# Altium PCB pcbCambiennhietdotestboard.PcbDoc
Units mm, origin at the board's own origin, x right, y up, seen from the top; angles counter-clockwise.
Board outline 68.38 x 50.51 mm, 2 copper layers (Top Layer, Bottom Layer); 51 components, 49 nets, 185 pads, 40 vias.
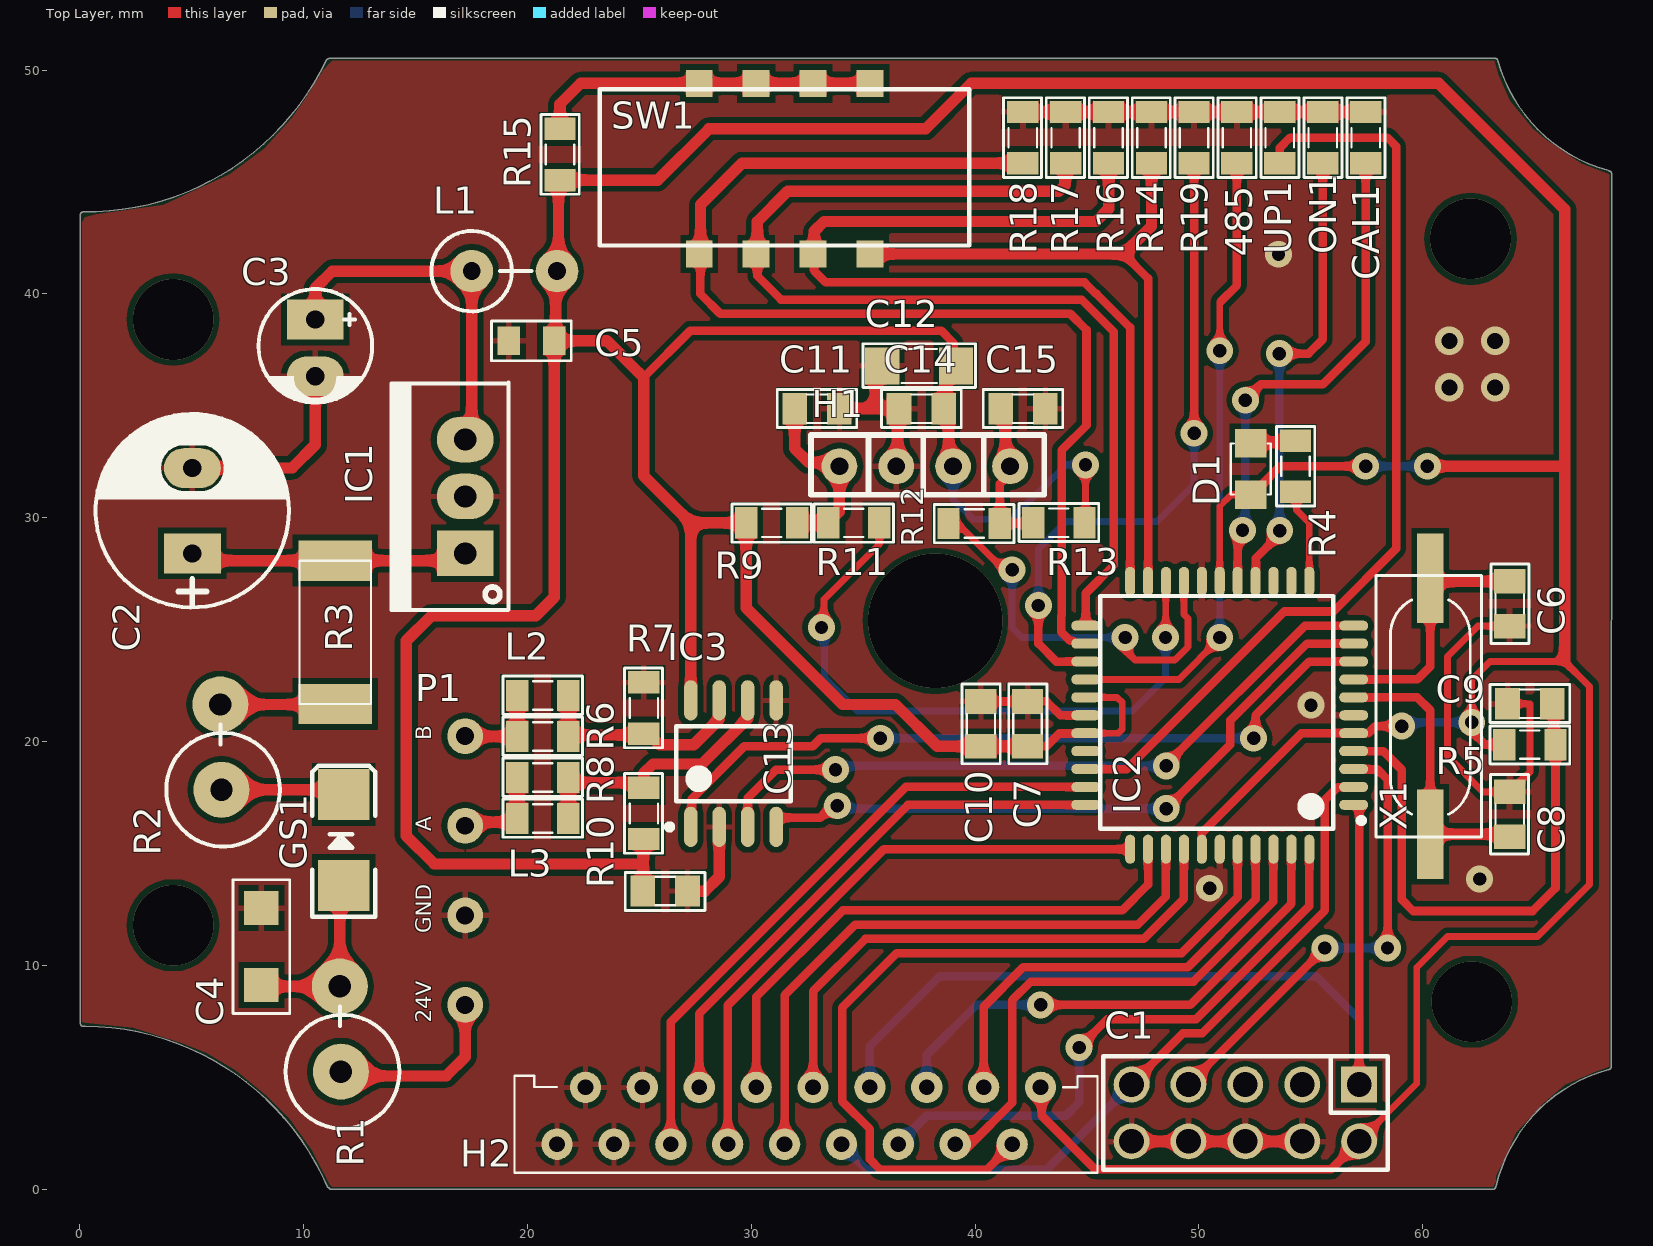
[diagram p0: Top Layer view]
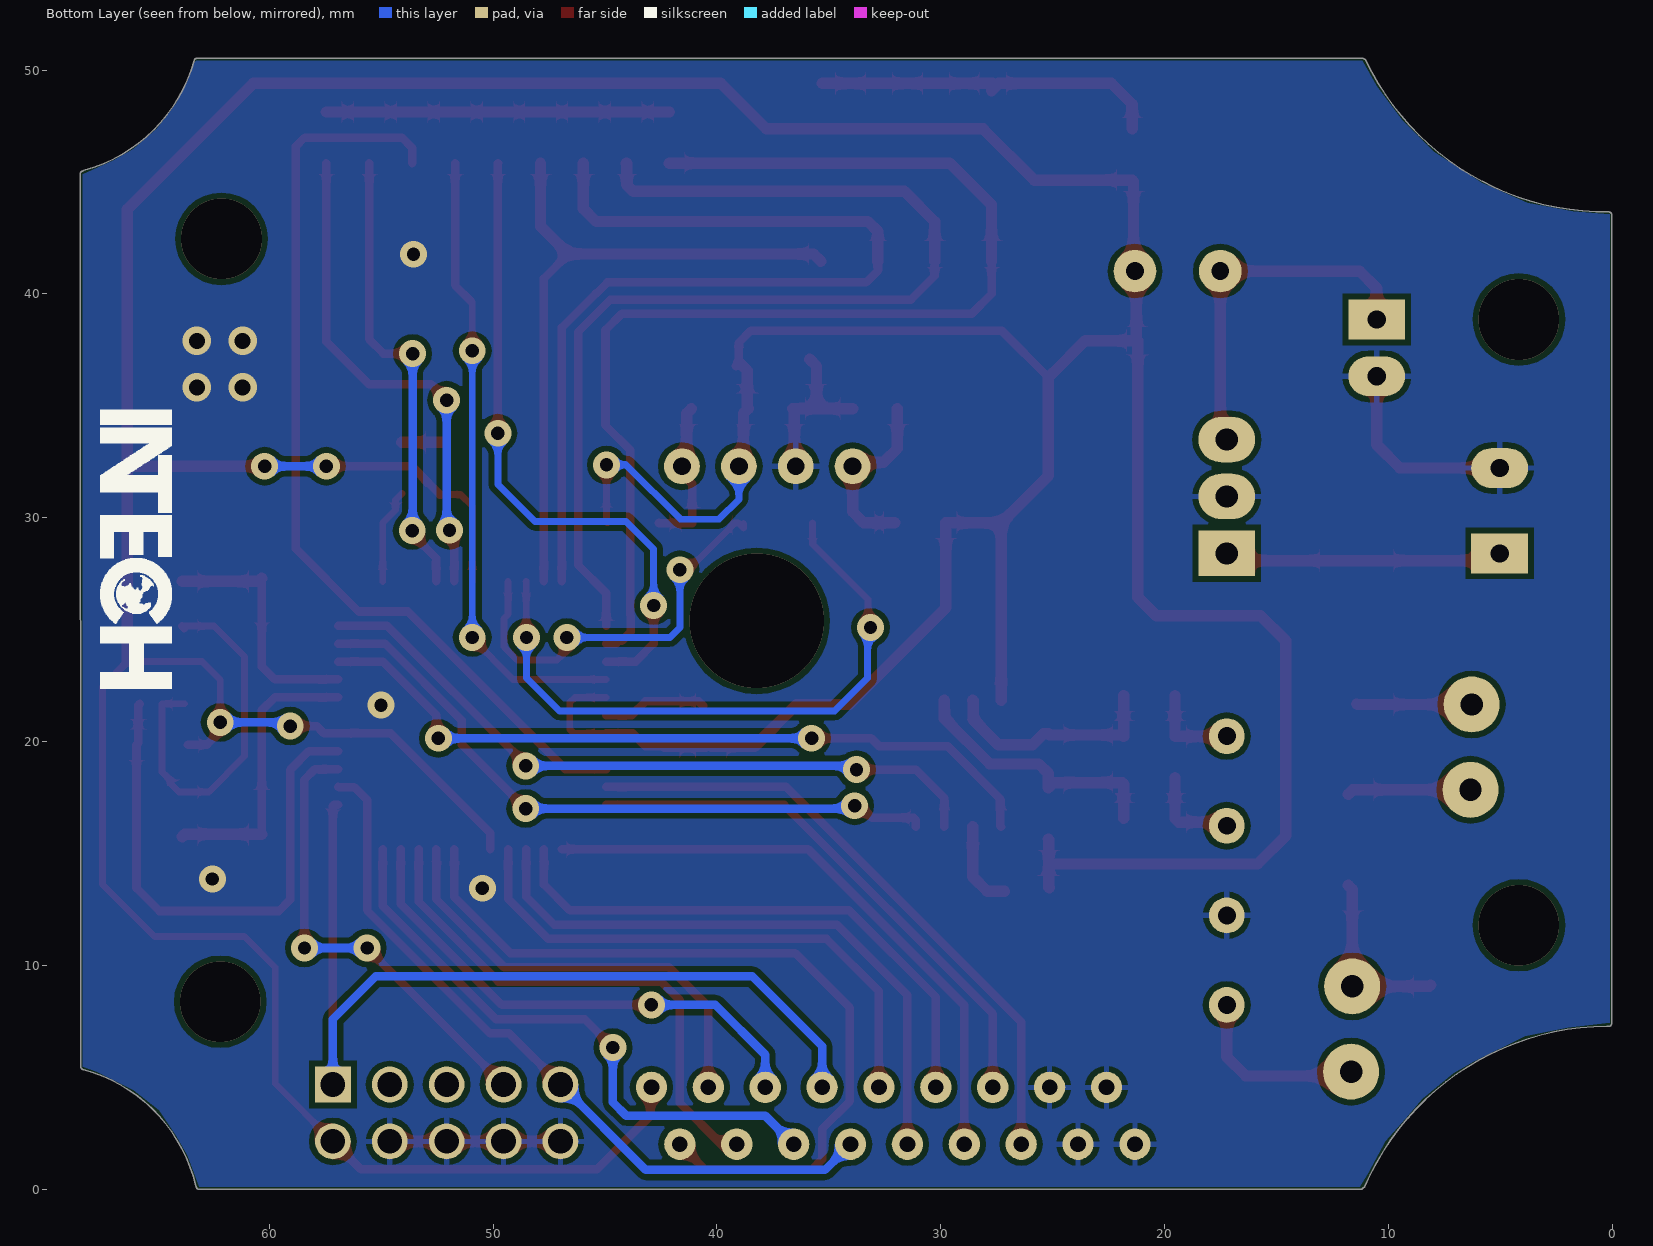
[diagram p1: Bottom Layer view, seen from below]
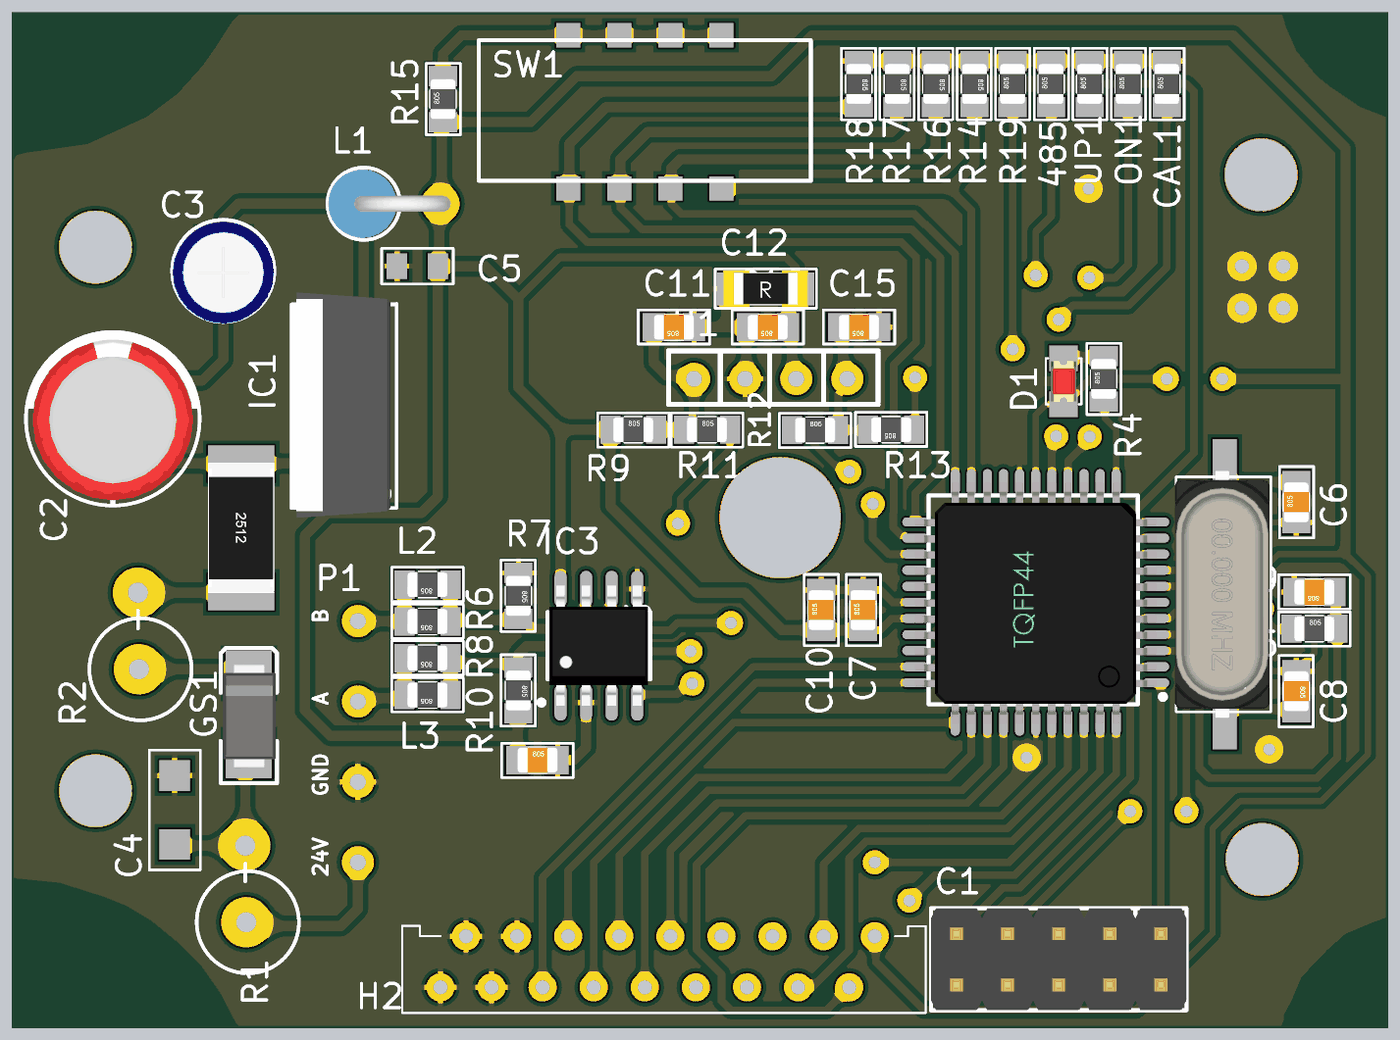
[diagram p2: 3D render of the assembled board from above, using the file's embedded part models]

## Layer stack, top to bottom
Top Solder: solder mask 0.0102, Solder Resist, Dk 3.5
Top Layer: signal copper 0.0356
Dielectric 1: dielectric 0.32, FR-4, Dk 4.8
Bottom Layer: signal copper 0.0356
Bottom Solder: solder mask 0.0102, Solder Resist, Dk 3.5

## Board outline
0.223,7.305 ccw(c0.254,7.429) 0.253,7.302 cw(c0.176,-4.572) 11.069,0.153 ccw(c11.186,0.203) 11.154,0.08 ccw(c11.266,0.14) 11.266,0.012 63.12,0.012 ccw(c63.12,0.14) 63.247,0.127 ccw(c63.156,0.216) 63.28,0.187 cw(c70.129,-1.422) 68.258,5.36 ccw(c68.224,5.483) 68.27,5.364 ccw(c68.279,5.491) 68.407,5.491 68.428,45.364 ccw(c68.301,45.364) 68.428,45.364 ccw(c68.301,45.364) 68.306,45.492 ccw(c68.224,45.394) 68.258,45.516 cw(c70.129,52.299) 63.347,50.427 ccw(c63.224,50.394) 63.21,50.52 ccw(c63.195,50.394) 63.195,50.521 11.176,50.521 ccw(c11.176,50.394) 11.1,50.495 ccw(c11.138,50.374) 11.023,50.429 cw(c0.303,55.536) 0.179,43.663 ccw(c0.176,43.536) 0.049,43.536 0.049,7.424 ccw(c0.176,7.424)

## Design rules (kind name [scope] priority, off if disabled: settings)
Clearance [All] p1: gap=0.254 ignorepadtopadclearanceinfootprint=FALSE
PolygonConnect [All] p1: connectstyle=Relief reliefconductorwidth=0.254 reliefentries=4 polygonreliefangle="90 Angle" airgapwidth=0.254
RoutingVias [All] p1: holewidth=0.6 width=1.2 viastyle="Through Hole" minholewidth=0.6 minwidth=1.2 maxholewidth=0.6 maxwidth=1.2
SolderMaskExpansion [All] p1: expansion=0.102
Width [All] p1: maxlimit=0.508 minlimit=0.305 preferedwidth=0.381 minimp=50.000000 maximp=50.000000 favimp=50.000000
30 further rules are at their usual default settings.

## Components (designator, comment, footprint, x,y, rotation, side; value= is the part's Value field where it differs from the comment)
485 "0R" RES-SMD-0805 51.692,46.982 r90 top
C1 "JP5x2" JP5-D2T 52.07,3.429 r180 top
C2 "220uF/35V" CP1.5/3.4 5.049,28.417 r90 top value=100uF/35V/50V
C3 "100uF/16V" CP1/2 10.541,38.862 r270 top value=10uF/50V
C4 "10uF" 1206C-GENERIC 8.128,9.144 r90 top
C5 "10uF" 0805C-GENERIC 20.955,37.91 r180 top
C6 "33pF" CN-SMD-0805 63.881,26.167 r90 top
C7 "0.1uF" CN-SMD-0805 42.346,20.802 r90 top
C8 "33pF" CN-SMD-0805 63.881,16.764 r270 top
C9 "10uF" CN-SMD-0805 64.778,21.701 r180 top
C10 "10uF" CN-SMD-0805 40.261,20.802 r90 top
C11 "10uF" CN-SMD-0805 32.944,34.877 r180 top
C12 "10uF" SM-1206 37.507,36.784 r0 top value=103
C13 "10uF" CN-SMD-0805 26.162,13.335 r0 top
C14 "0.1uF" CN-SMD-0805 37.608,34.877 r180 top
C15 "10uF" CN-SMD-0805 42.143,34.877 r180 top
CAL1 "0R" RES-SMD-0805 57.444,46.982 r90 top
D1 "LED2" LED-0805-Red 52.31,33.327 r270 top
GS1 "D0.0" DIO-SMD-106 11.811,15.621 r270 top value=1N5007
H1 "Header4P" HEADER4P 33.944,32.306 r0 top
H2 "Header 9x2" HEADER9x2-2.54mm 41.656,2.032 r180 top
IC1 "LM2940" QTO-220 17.234,28.417 r90 top
IC2 "ATMEL 16A" TQFP44 50.927,21.186 r180 top value="Atmega 16L"
IC3 "MAX485" SO8 29.213,19.028 r90 top
L1 "10uH" RES-1WD 19.177,41.021 r0 top
L2 "220nH" RES-SMD-0805 20.693,22.07 r180 top
L3 "220nH" RES-SMD-0805 20.693,16.581 r180 top
ON1 "0R" RES-SMD-0805 55.527,46.982 r90 top
P1 "PIN IO" pcbLibPIN1 17.234,8.253 r90 top
R1 "2R/3W" R2WD 11.633,10.352 r270 top value="R2W - 47"
R2 "160R/2W" R2WD 6.299,22.939 r270 top value="R2W - 47"
R3 "180R" RES-SMD-2512 11.303,24.892 r270 top
R4 "20k" RES-SMD-0805 54.308,32.306 r90 top
R5 "10k" RES-SMD-0805 64.778,19.875 r0 top
R6 "120R" RES-SMD-0805 20.693,20.24 r180 top
R7 "5k6" RES-SMD-0805 25.211,21.513 r270 top
R8 "120R" RES-SMD-0805 20.693,18.411 r180 top
R9 "24k" RES-SMD-0805 30.923,29.779 r0 top
R10 "5k6" RES-SMD-0805 25.211,16.803 r270 top
R11 "120R" RES-SMD-0805 34.587,29.779 r0 top
R12 "120R" RES-SMD-0805 39.959,29.754 r0 top
R13 "24k" RES-SMD-0805 43.745,29.782 r180 top
R14 "100k" RES-SMD-0805 47.882,46.982 r270 top
R15 "10k" RES-SMD-0805 21.463,46.228 r90 top
R16 "100k" RES-SMD-0805 45.965,46.982 r270 top
R17 "100k" RES-SMD-0805 44.047,46.982 r270 top
R18 "100k" RES-SMD-0805 42.13,46.982 r270 top
R19 "MD" RES-SMD-0805 49.774,46.982 r90 top
SW1 "Switch 4bit" SW-4-BIT-SMD 35.306,41.783 r180 top
UP1 "0R" RES-SMD-0805 53.609,46.982 r90 top
X1 "12Mhz" XTAL-RU49/4 60.325,16.637 r90 top value=4Mhz

## Footprints (in the part's own frame and the unit in brackets; to place one, negate y for a bottom-side part, rotate by r counter-clockwise, add the part's x,y. Pads: shape width x height; smd on the part's side, far side on the other; paste and mask are expansions set on the pad)
0805C-GENERIC [mil] "CAPACITOR 0805"
  rect 40x50 smd: 1(-10,0) 2(70,0)
  silkscreen extent -40,-35 100,35, body extent -11,-25 70,25, height 26
1206C-GENERIC [mil]
  rect 60x60 smd: 1(0,0) 2(135,0)
  silkscreen extent -50,-50 185,50, body extent -8,-29 147,29, height 46
CN-SMD-0805 [mm]
  rect 1.1x1.397 smd: 1(-1,0) 2(1,0)
  silkscreen extent -1.78,-0.86 1.78,0.84, body extent -1,-0.62 1,0.63, height 0.8
CP1.5/3.4 [mil] "Tu hoa 220->470uF,16V, 470uF/16V,25V"
  rect 70x100 hole 32: 1(0,0)
  oval 70x100 hole 32: 2(150,0)
  silkscreen extent -95,-170 245,170, body extent -85,-157 230,157, height 446
CP1/2 [mil] "Tu hoa < 22uF/16>50V"
  rect 70x100 hole 32: 1(0,0)
  oval 70x100 hole 32: 2(100,0)
  silkscreen extent -53,-100 146,100, body extent -49,-99 149,99, height 287
DIO-SMD-106 [mil]
  rect 90x90.55 smd: 1(80,0) 2(-80,0)
  silkscreen extent -130,-55 135,55, body extent -99,-50 106,52, height 95
HEADER4P [mm]
  round 1.6 hole 0.8: 1(0,0) 2(2.54,0) 3(5.08,0) 4(7.62,0)
  silkscreen extent -1.27,-1.27 9.14,1.4
HEADER9x2-2.54mm [mm]
  round 1.4 hole 0.7: 1(20.32,0) 2(17.78,0) 3(15.24,0) 4(12.7,0) 5(10.16,0) 6(7.62,0) 7(5.08,0) 8(2.54,0) 9(0,0) 10(19.05,-2.54) 11(16.51,-2.54) 12(13.97,-2.54) 13(11.43,-2.54) 14(8.89,-2.54) 15(6.35,-2.54) 16(3.81,-2.54) 17(1.27,-2.54) 18(-1.27,-2.54)
  silkscreen extent -3.81,-3.06 22.22,1.27
JP5-D2T [mm] "10 pins, dual pin, straight, gold plating"
  rect 1.6x1.6 hole 1.1: 1(-5.08,-1.27)
  round 1.6 hole 1.1: 2(-2.54,-1.27) 3(0,-1.27) 4(2.54,-1.27) 5(5.08,-1.27) 6(5.08,1.27) 7(2.54,1.27) 8(0,1.27) 9(-2.54,1.27) 10(-5.08,1.27)
  silkscreen extent -6.35,-2.54 6.35,2.54, body extent -6.35,-2.54 6.35,2.54, height 8.55
LED-0805-Red [mil]
  rect 50x55 smd: 1(0,0) 2(90,0)
  silkscreen extent 0,-35 90,35, body extent 5,-25 85,25, height 43
pcbLibPIN1 [mm]
  round 1.6 hole 0.8: 1(0,0) 2(4,0) 3(8,0) 4(12,0)
QTO-220 [mil] "TO-220 - 1-2-3"
  rect 80x100 hole 39: 1(0,0)
  oval 80x100 hole 39: 2(100,0) 3(200,0)
  silkscreen extent -100,-76 300,130, body extent -119,-64 322,121, height 755
R2WD [mm] "R2W, 2 pin, 700mil"
  round 2.5 hole 1: 1(1.27,0) 2(5.08,0.051)
  silkscreen extent 2.16,-2.41 7.62,2.67
RES-1WD [mm]
  round 1.905 hole 0.8: 1(-1.651,0) 2(2.159,0)
  silkscreen extent -3.45,-1.8 1.02,1.8, body extent -3.43,-1.7 2.67,1.7, height 12.65
RES-SMD-0805 [mil]
  rect 39.37x55 smd: 1(-45,0) 2(45,0)
  silkscreen extent -70,-34 70,33, body extent -39,-25 39,25, height 31
RES-SMD-2512 [mm] "Chip Capacitor, Body 3.2x2.5mm, IPC Medium Density"
  rect 1.8x3.3 smd: 1(-3.2,0.127) 2(3.2,0.127)
  silkscreen extent -3.2,-1.47 3.2,1.73, body extent -3.2,-1.47 3.2,1.73, height 0.6
SM-1206 [mil] "Compoment SMD 120x60mil"
  rect 60x65 smd: 1(-65,0) 2(65,0)
  silkscreen extent -99,-38 99,39, body extent -83,-35 83,36, height 25
SO8 [mm] "SOIC, 8-Leads, Body 4.9x3.9mm, Pitch 1.27mm, IPC High Density"
  oval 1.8x0.6 smd: 1(-2.825,1.905) 2(-2.825,0.635) 3(-2.825,-0.635) 4(-2.825,-1.905) 5(2.825,-1.905) 6(2.825,-0.635) 7(2.825,0.635) 8(2.825,1.905)
  silkscreen extent -2.95,-2.55 1.68,2.98, body extent -2.99,-2.45 3,2.45, height 1.6
SW-4-BIT-SMD [mm]
  rect 1.2x1.2 smd: 1(0,0) 2(2.54,0) 3(5.08,0) 4(7.62,0) 5(7.62,-7.62) 6(5.08,-7.62) 7(2.54,-7.62) 8(0,-7.62)
  silkscreen extent -4.44,-7.37 12.07,-0.38
TQFP44 [mm] "TQFP, 44-Leads, Body 10X10mm, Pitch 0.80mm, IPC High Density"
  oval 1.3x0.45 smd: 1(-5.981,4) 2(-5.981,3.2) 3(-5.981,2.4) 4(-5.981,1.6) 5(-5.981,0.8) 6(-5.981,0) 7(-5.981,-0.8) 8(-5.981,-1.6) 9(-5.981,-2.4) 10(-5.981,-3.2) 11(-5.981,-4) 23(5.981,-4) 24(5.981,-3.2) 25(5.981,-2.4) 26(5.981,-1.6) 27(5.981,-0.8) 28(5.981,0) 29(5.981,0.8) 30(5.981,1.6) 31(5.981,2.4) 32(5.981,3.2) 33(5.981,4)
  oval 0.45x1.3 smd: 12(-4,-5.981) 13(-3.2,-5.981) 14(-2.4,-5.981) 15(-1.6,-5.981) 16(-0.8,-5.981) 17(0,-5.981) 18(0.8,-5.981) 19(1.6,-5.981) 20(2.4,-5.981) 21(3.2,-5.981) 22(4,-5.981) 34(4,5.981) 35(3.2,5.981) 36(2.4,5.981) 37(1.6,5.981) 38(0.8,5.981) 39(0,5.981) 40(-0.8,5.981) 41(-1.6,5.981) 42(-2.4,5.981) 43(-3.2,5.981) 44(-4,5.981)
  silkscreen extent -6.45,-5.33 5.33,5.07, body extent -5.99,-5.96 6.01,6.04, height 1.05
XTAL-RU49/4 [mm]
  rect 4x1.2 smd: 1(-0.762,0) 2(10.668,0)
  silkscreen extent -0.89,-2.29 10.8,2.41, body extent -1.2,-2.22 11.1,2.48, height 4.3

## Part data
485 CAL1 ON1 R3 R4 R5 R6 R7 R8 R9 R10 R11 R12 R13 R14 R15 R16 R17 R18 R19 UP1: library part Res-SMD, "Resistor", Manufacturer="Generic Components", Class=Passive, Published=08/06/2000, Publisher="Altium Hobart Technology Centre"
C1: "WR-PHD 2.54 mm Dual Socket Header", Manufacturer="Würth Elektronik eiSos GmbH", partNo=61301021821, ComponentLink1 Description=Manufacturer, ComponentLink1URL=http://www.we-online.com, ComponentLink2 Description=Datasheet, ComponentLink2URL=http://katalog.we-online.de/em/datasheet/6130xx21821.pdf, Created by="Karrer Zheng", Created Date="29 March 2013", NoPins=10
C2: library part CP3, "Cap 100uF/35V - 470uF/16V", Description 1="1000uF/6,3V - 470uF/16V - 330uF - 25V", Description 2="220uF/35V - 100uF/50V - 63V - 4,7uF/200V", Description 3="22uF => 33uF100V - 3,3uF => 4,7uF/250V", Description 4="2,2uF =>3,3uF/350 - 2,2uF/400V - 1uF/450V"
C3: library part CP1, "Cap P  0,1uF < 22uF , 16 - 50V", Description 1="10 => 220uF/6,3V/10V - 10uF => 100uF/16V", Description 2="0,1uF => 33uF/50V - 10uF => 22uF/63V", Description 3="0,47uF => 10uF/100V"
C4 C6 C7 C8 C9 C10 C11 C13 C14 C15: library part 1206C-10U-35V-X7R, "GENERIC CAPACITOR NON POLARISED 1206", Manufacturer="Taiyo Yuden", Manufacturer Part Number=GMK316F106ZL-T, Supplier Part Number 1=587-1352-2-ND, Reel=C90, Supplier 1=Digi-Key
C5: library part 0805C-10UF-25V-X5R-SAM, "CAPACITOR 0805 CERAMIC", Manufacturer 1=Samsung, Manufacturer Part Number 1=CL21A106KACLRNC, Reel=C19, Supplier Part Number 1=CL21A106KACLRNC, Supplierr 1=Samsung
C12: library part CM, "Cap SMD"
D1: "Typical RED, GREEN, YELLOW, AMBER GaAs LED", LatestRevisionDate=17-Jul-2002, LatestRevisionNote="Re-released for DXP Platform.", PackageDescription="SM LED; 2 Flat Leads", PackageReference=3.2X1.6X1.1, PackageVersion=Feb-2002, Published=8-Jun-2000, Publisher="Altium Limited"
GS1: library part "Diode SMD", "Default Diode", Code - JEDEC=DO-214-AB, Published=8-Jun-2000, Publisher="Altium Limited", Revision="July-2002: Re-released for DXP Platform."
H1: library part HEADER4_PIN
H2: library part HEADER9x2, "Header 9x2 2.54mm"
IC1: library part TL-780
IC2: library part ATmega16A-AU, "8-bit AVR Microcontroller, 16KB Flash, 512 Bytes EEPROM, 1KB SRAM, 44-pin TQFP, Industrial Grade (-40癈 to 85癈)"
IC3: "RS232 - RS485 (Same sn75176)"
L1 L2 L3: library part L
P1: library part PIN, "Input source 24V and RS485pin"
R1 R2: library part R2W, "Resistor 2W"
SW1: library part "Switch  4 bit"
X1: library part XT2, "Crystal, 32.768 KHz, -40 to 85 degC, 3.2 x 1.5 x 0.9 mm SMD"

## Via types
v1: diameter 1.2, hole 0.6, Top Layer to Bottom Layer, 31 vias
v2: diameter 1.27, hole 0.711, Top Layer to Bottom Layer, 4 vias
v3: diameter 3.6, hole 3.6, Top Layer to Bottom Layer, 4 vias
v4: diameter 6, hole 6, Top Layer to Bottom Layer, 1 vias

## Nets (pads, with @x,y where several pads share a name; then routed paths per layer and width w, separated by ;. In a path a pad name is that pad's centre, name@x,y a point inside that pad or via, vN(x,y) a via of type N, cw(c..) or ccw(c..) an arc to the next point about the centre after c; other vN are vias at no path point)
+24: P1.1 R1.2 | length 8.3
  Top Layer w0.508: R1.2 11.876,5.08 16.383,5.08 17.234,5.931 P1.1
GND: 485.2 C1.6 C1.7 C1.8 C1.9 C2.2 C3.2 C4.2 C5.2 C6.1 C7.2 C8.1 C9.2 C10.2 C11.1 C12.1 C13.2 C14.2 C15.1 CAL1.2 H1.2 H2.1 H2.2 H2.10 H2.11 IC1.2 IC2.6 IC2.18 IC2.28 IC2.39 IC3.2 IC3.5 ON1.2 P1.2 R7.1 R14.1 R16.1 R17.1 R18.1 R19.2 UP1.2 | length 64.9
  Top Layer w0.305: C9.2 64.778,21.701 64.778,18.661 64.427,18.31 64.427,18.161 64.03,17.764 C8.1 62.693,17.764 61.095,19.361 61.095,23.811 62.452,25.167 C6.1
  Top Layer w0.381: C10.2@40.61,21.602 40.811,21.803 C7.2 43.195,21.803 43.811,21.186 IC2.28 ; C6.1@63.778,25.064 C6.1
  Top Layer w0.508: C2.2 9.504,32.227 10.541,33.264 C3.2 ; C13.2 27.94,13.335 28.578,13.973 IC3.2 ; C11.1 35.556,34.877 ; C12.1@35.856,37.084 35.556,36.784 35.556,34.877 ; H1.2 36.546,32.368 36.546,34.815 C14.2 35.556,34.877 ; R18.1 R17.1 R16.1 R14.1 R19.2 485.2 UP1.2 ON1.2 CAL1.2 ; C1.6 C1.7 C1.8 C1.9
  other v1: 50.478,13.462 62.534,13.875 55.004,21.64 53.552,41.772
  other v2: 61.179,35.829 63.228,35.829 61.179,37.907 63.228,37.907
NetC2_1: C2.1 IC1.1 R3.1 | length 13.2
  Top Layer w0.508: C2.1 4.668,28.417 4.993,28.092 R3.1 16.909,28.092 IC1.1
NetC3_1: C3.1 IC1.3 L1.1 | length 16.3
  Top Layer w0.508: C3.1 10.541,40.259 11.303,41.021 L1.1 17.526,33.789 IC1.3
NetC4_1: C4.1 GS1.1 R1.1 | length 8.1
  Top Layer w0.508: C4.1 8.19,9.082 R1.1 11.633,13.411 GS1.1
NetC6_2: C6.2 IC2.8 X1.2 | length 11.2
  Top Layer w0.381: IC2.8 59.75,22.786 60.325,23.361 X1.2
  Top Layer w0.508: X1.2 60.463,27.167 C6.2
NetC8_2: C8.2 IC2.7 X1.1 | length 12.8
  Top Layer w0.381: IC2.7 59.75,21.986 60.325,21.411 X1.1
  Top Layer w0.508: X1.1 63.77,15.875 C8.2
NetC9_1: C9.1 IC2.4 R5.2 | length 24.1
  Top Layer w0.381: IC2.4 58.226,19.586 59.055,18.757 59.055,12.954 59.563,12.446 64.897,12.446 65.921,13.47 R5.2 65.849,19.947 65.849,21.629 C9.1
NetD1_1: D1.1 R4.2 | length 1.8
  Top Layer w0.508: D1.1@52.31,33.373 R4.2@54.069,33.373
NetGS1_2: GS1.2 R2.2 | length 5.5
  Top Layer w0.508: R2.2 11.605,17.859 GS1.2
NetIC2_12: IC2.12 R4.1 | length 4.3
  Top Layer w0.305: R4.1@54.069,31.087 54.356,30.799 54.356,30.353 54.927,29.782 IC2.12
NetIC3_6: IC3.6 L3.1 R8.1 R10.1 | length 12.1
  Top Layer w0.508: L3.1 21.836,18.112 21.903,18.178 24.979,18.178 R10.1 25.211,18.178 25.211,18.598 25.624,19.011 27.814,19.011 29.848,21.045 IC3.6
NetIC3_7: IC3.7 L2.1 R6.1 R7.2 | length 10.1
  Top Layer w0.508: L2.1 R6.1 21.901,20.305 25.146,20.305 R7.2 25.409,20.37 25.91,19.87 27.44,19.87 28.56,20.991 28.56,21.835 IC3.7
NetR2_1: R2.1 R3.2 | length 5.1
  Top Layer w0.508: R2.1 11.407,21.669 R3.2
NetR15_2: R15.2 SW1.5 SW1.6 SW1.7 SW1.8 | length 15.5
  Top Layer w0.508: R15.2 21.463,48.478 22.388,49.403 27.415,49.403 SW1.5@27.74,49.078 ; SW1.5 SW1.6 SW1.7 SW1.8
PIN_1: C1.1 H2.15 IC2.1 | length 41.4
  Top Layer w0.381: IC2.1 57.118,17.186 57.15,17.154 C1.1
  Bottom Layer w0.381: H2.15 35.306,6.416 38.415,9.525 55.245,9.525 57.15,7.62 C1.1
PIN_2: C1.5 H2.6 IC2.2 | length 33.3
  Top Layer w0.381: C1.5 49.274,6.983 50.138,6.983 55.626,12.471 55.626,17.411 56.188,17.973 56.895,17.973 IC2.2
  Bottom Layer w0.381: H2.6 35.181,0.887 43.178,0.887 C1.5
PIN_3: C1.4 IC2.3 | length 20.6
  Top Layer w0.381: C1.4 v1(55.626,10.795) ; IC2.3 56.921,18.773 57.961,18.773 58.42,18.314 v1(58.42,10.795)
  Bottom Layer w0.381: v1(55.626,10.795) v1(58.42,10.795)
PIN_4: C1.3
PIN_5: C1.10 C5.1 C7.1 C10.1 C12.2 C13.1 C14.1 D1.2 H1.3 H2.18 IC2.5 IC2.17 IC2.27 IC2.29 IC2.38 IC3.8 L1.2 R5.1 R9.1 R10.2 R13.1 R15.1 | length 287
  Top Layer w0.305: R13.1 44.933,29.826 v1(44.933,32.368) ; IC2.29 46.397,20.386 46.576,20.565 46.576,21.755 46.345,21.986 IC2.27 ; IC2.17 50.927,30.521 51.448,31.041 D1.2 ; C1.10 59.725,4.734 59.725,9.933 61.095,11.303 65.113,11.303 67.437,13.627 67.437,22.477 66.328,23.586 62.994,23.586 62.18,22.771 v1(62.18,20.867)
  Top Layer w0.381: 25.199,36.27 27.283,38.354 38.5,38.354 39.024,37.83 39.024,36.95 39.024,36.918 C12.2 ; C7.1@42.356,19.803 43.195,19.803 43.765,20.373 44.933,20.373 IC2.29 ; H2.18 42.977,4.521 42.977,3.3 45.363,0.914 55.905,0.914 C1.10 ; IC2.38 50.127,15.936 54.577,20.386 IC2.5 57.558,20.386 57.875,20.703 v1(59.055,20.703) ; D1.2 52.374,31.041 53.156,31.823 53.156,31.838 53.624,32.306 v1(57.444,32.306) ; v1(62.18,20.867) 62.107,20.867 61.942,20.703 62.769,19.875 R5.1
  Top Layer w0.508: C13.1@25.162,13.484 25.187,13.508 25.187,15.635 R10.2 ; 25.162,14.547 15.86,14.547 14.605,15.802 14.605,24.511 15.727,25.633 20.383,25.633 21.209,26.459 C5.1 ; IC3.8 27.308,29.779 ; H1.3 38.816,32.514 38.816,34.669 C14.1 38.65,34.919 38.65,36.576 C12.2@39.024,36.95 ; C10.1 38.315,19.803 36.449,21.669 34.09,21.669 29.78,25.979 R9.1 27.308,29.779 ; C10.1@40.34,19.991 40.529,19.803 C7.1 C7.1@42.356,19.803 ; v1(60.198,32.306) 66.296,32.306 66.328,32.337 ; 66.328,23.586 66.328,32.337 ; C5.1 23.56,37.91 24.979,36.491 25.199,36.27 25.211,36.258 25.211,31.876 27.308,29.779 ; C5.1 21.273,37.973 21.273,40.957 L1.2 21.399,41.084 21.399,45.021 R15.1 25.832,45.085 28.118,47.371 37.792,47.371 39.824,49.403 60.706,49.403 66.328,43.781 66.328,32.337
  Bottom Layer w0.305: H1.3 39.024,30.826 39.909,29.941 41.625,29.941 44.052,32.368 v1(44.933,32.368)
  Bottom Layer w0.381: v1(57.444,32.306) v1(60.198,32.306) ; v1(59.055,20.703) 59.219,20.867 v1(62.18,20.867)
PIN_9: IC2.9 IC3.1 | length 33.9
  Top Layer w0.381: IC3.1 27.35,16.245 27.35,17.454 29.699,19.803 32.755,19.803 33.113,20.161 v1(35.778,20.161) ; v1(52.442,20.158) 52.527,20.243 52.527,21.186 54.927,23.586 IC2.9
  Bottom Layer w0.381: v1(35.778,20.161) v1(35.778,20.161) 52.441,20.159 v1(52.442,20.158)
PIN_10: IC2.10 IC3.4 | length 30.1
  Top Layer w0.381: IC3.4 31.118,16.511 31.219,16.612 33.098,16.612 33.631,17.145 v1(33.853,17.145) ; v1(48.539,17.018) 51.398,19.876 51.398,20.955 54.829,24.386 IC2.10
  Bottom Layer w0.381: v1(33.853,17.145) 33.98,17.018 v1(48.539,17.018)
PIN_11: IC2.11 IC3.3 | length 31.7
  Top Layer w0.381: IC3.3 29.848,17.496 31.109,18.757 v1(33.768,18.757) ; v1@48.752,18.923 48.752,19.207 54.731,25.186 IC2.11
  Bottom Layer w0.381: v1(33.768,18.757) 33.934,18.923 v1@48.752,18.923
  other v1: 48.539,18.923
PIN_15: IC2.15 ON1.1 | length 20.7
  Top Layer w0.381: IC2.15 52.54,27.18 52.54,28.205 53.609,29.273 v1(53.609,29.432) v1@53.552,29.432 ; v1(53.594,37.338) 54.892,37.338 55.527,37.973 ON1.1
  Bottom Layer w0.381: v1(53.594,37.338) 53.594,29.447 v1(53.609,29.432)
PIN_16: CAL1.1 IC2.16 | length 22.9
  Top Layer w0.381: IC2.16 51.727,29.01 51.897,29.18 51.943,29.18 v1@51.943,29.432 ; v1(51.943,29.448) v1@51.943,29.432 ; v1@52.07,29.305 v1@51.943,29.432 ; v1(52.07,35.254) 52.07,35.276 52.752,35.958 55.527,35.958 57.444,37.876 CAL1.1
  Bottom Layer w0.381: v1(51.943,29.448) 52.07,29.575 v1(52.07,35.254)
PIN_19: IC2.19 R12.1 | length 18.6
  Top Layer w0.305: R12.1 38.816,29.555 39.036,29.775 39.205,29.775 41.123,27.857 41.485,27.857 v1(41.656,27.686) ; v1(46.702,24.66) 46.702,24.099 47.148,23.653 48.922,23.653 49.511,24.243 49.511,25.501 49.327,25.685 IC2.19
  Bottom Layer w0.305: v1(41.656,27.686) 41.656,25.106 42.102,24.66 v1(46.702,24.66)
PIN_20: IC2.20 R11.2 | length 28.8
  Top Layer w0.305: v1@33.255,25.106 33.255,26.366 35.73,28.84 R11.2 ; v1(48.505,24.66) 48.516,24.671 48.516,27.156 IC2.20
  Bottom Layer w0.305: v1(33.144,25.106) 33.274,24.976 33.274,22.841 34.744,21.371 47.025,21.371 48.505,22.851 v1(48.505,24.66)
PIN_21: IC2.21 R14.2 SW1.1 | length 31.1
  Top Layer w0.381: 46.638,41.783 47.727,40.694 IC2.21
  Top Layer w0.508: SW1.1@35.36,41.458 35.685,41.783 46.638,41.783 47.882,43.027 R14.2
PIN_22: IC2.22 R16.2 SW1.2 | length 43.9
  Top Layer w0.381: SW1.2@32.82,41.458 32.82,41.029 33.336,40.513 44.894,40.513 45.407,40 45.429,40 46.927,38.502 IC2.22
  Top Layer w0.508: SW1.2@32.82,41.458 32.82,42.799 33.255,43.234 45.396,43.234 45.965,43.803 R16.2
PIN_23: IC2.23 R17.2 SW1.3 | length 48.4
  Top Layer w0.381: SW1.3@30.28,41.458 30.28,40.805 31.334,39.751 44.758,39.751 46.19,38.319 46.19,27.876 44.946,26.632 IC2.23
  Top Layer w0.508: SW1.3@30.28,41.458 30.28,43.234 31.631,44.585 43.745,44.585 44.027,44.867 44.027,45.839 R17.2
PIN_24: IC2.24 R18.2 SW1.4 | length 52.3
  Top Layer w0.381: SW1.4@27.74,41.458 27.74,40 28.624,39.116 44.253,39.116 44.978,38.391 44.978,34.13 43.873,33.026 43.873,25.655 43.851,25.633 43.851,24.909 44.244,24.516 44.372,24.516 44.502,24.386 IC2.24
  Top Layer w0.508: SW1.4@27.74,41.458 27.74,43.985 29.594,45.839 R18.2
PIN_25: IC2.25 R19.1 | length 29.6
  Top Layer w0.381: v1@42.828,26.517 v1(42.828,26.087) 42.828,24.386 43.628,23.586 IC2.25 ; R19.1 49.784,45.829 49.784,33.801 49.774,33.792 v1(49.784,33.782)
  Bottom Layer w0.305: v1(42.828,26.087) 42.828,28.604 44.069,29.845 48.133,29.845 49.784,31.496 v1(49.784,33.782)
PIN_26: 485.1 IC2.26 | length 28.3
  Top Layer w0.305: IC2.26 49.102,22.786 50.927,24.611 v1(50.927,24.66) v1@50.927,24.873 ; v1(50.927,37.465) 50.927,39.614 50.967,39.654
  Top Layer w0.381: 50.967,39.654 51.692,40.379 485.1
  Bottom Layer w0.305: v1@50.927,24.873 v1(50.927,37.465)
PIN_31: IC2.31 UP1.1 | length 42.1
  Top Layer w0.381: IC2.31 46.773,18.786 53.808,25.821 56,25.821 58.801,28.622 58.801,46.593 58.412,46.982 54.069,46.982 53.609,46.522 UP1.1
PIN_32: H2.3 IC2.32 | length 28.3
  Top Layer w0.381: H2.3 26.416,7.493 36.909,17.986 IC2.32
PIN_33: H2.12 IC2.33 | length 24.4
  Top Layer w0.381: H2.12 27.686,7.865 37.007,17.186 IC2.33
PIN_34: H2.4 IC2.34 | length 27.1
  Top Layer w0.381: H2.4 28.956,8.237 35.924,15.205 IC2.34
PIN_35: H2.13 IC2.35 | length 25.2
  Top Layer w0.381: H2.13 30.226,8.609 34.09,12.473 46.573,12.473 47.727,13.627 IC2.35
PIN_36: H2.5 IC2.36 | length 27.6
  Top Layer w0.381: H2.5 31.496,8.684 34.649,11.838 47.271,11.838 48.527,13.094 IC2.36
PIN_37: H2.14 IC2.37 | length 24.8
  Top Layer w0.381: H2.14 32.766,8.864 35.104,11.203 47.534,11.203 49.327,12.996 IC2.37
PIN_40: H2.9 IC2.40 | length 36.2
  Top Layer w0.381: H2.9 40.511,0.887 35.778,0.887 35.306,1.359 35.306,2.709 34.063,3.952 34.063,8.128 36.503,10.568 49.232,10.568 51.727,13.062 IC2.40
PIN_41: H2.17 IC2.41 | length 20
  Top Layer w0.381: H2.17 40.386,8.17 42.149,9.933 49.496,9.933 52.527,12.964 IC2.41
PIN_42: H2.8 IC2.42 | length 23.7
  Top Layer w0.381: H2.8 39.811,2.032 41.656,3.877 41.656,8.46 42.493,9.298 49.759,9.298 53.327,12.866 IC2.42
PIN_43: H2.16 IC2.43 | length 23
  Top Layer w0.381: v1(42.926,8.253) 49.612,8.253 54.127,12.768 IC2.43
  Bottom Layer w0.381: H2.16 37.846,6.031 40.068,8.253 v1(42.926,8.253)
PIN_44: H2.7 IC2.44 | length 26.7
  Top Layer w0.381: v1(44.648,6.35) 45.916,7.618 49.875,7.618 54.927,12.67 IC2.44
  Bottom Layer w0.381: H2.7 37.846,3.302 44.051,3.302 44.648,3.899 v1(44.648,6.35)
RS485_A: L3.2 P1.3 R8.2 | length 4.3
  Top Layer w0.508: P1.3 17.398,16.417 19.386,16.417 L3.2 R8.2
RS485_B: L2.2 P1.4 R6.2 | length 4.2
  Top Layer w0.508: P1.4 17.24,20.247 19.544,20.247 R6.2 L2.2
SCL: C15.2 H1.4 R12.2 R13.2 | length 7
  Top Layer w0.381: R12.2 42.574,29.754 R13.2 ; R12.2@41.109,29.779 41.109,31.521 41.564,31.976 H1.4
  Top Layer w0.508: C15.2 41.355,34.665 41.355,32.515 H1.4
SDA: C11.2 H1.1 R9.2 R11.1 | length 8.8
  Top Layer w0.508: C11.2 31.944,33.103 32.566,32.481 33.768,32.481 H1.1 33.554,32.306 33.944,31.916 33.944,30.279 R11.1 R9.2
pads on no net: C1.2 IC2.13 IC2.14 IC2.30
copper on no net:
  other v3: 62.18,8.393 4.191,11.811 4.191,38.862 62.127,42.458
  other v4: 38.227,25.4

## Polygon pours and split planes (outlines as drawn)
GND on Top Layer "Top Layer-GND" (solid, pour order 12): 11.176,50.292 10.922,50.003 10.16,48.803 9.504,47.871 8.255,46.482 6.731,45.339 3.779,43.985 0.762,43.561 0.254,43.434 0.127,43.18 0.127,7.493 0.254,7.453 2.413,7.239 4.668,6.522 5.715,6.096 6.985,5.334 8.382,4.191 9.398,3.175 10.383,1.778 11.176,0.254 11.303,0.127 63.135,0.127 63.246,0.381 63.246,0.635 63.635,1.359 64.135,2.54 65.421,3.899 66.328,4.699 67.691,5.272 68.326,5.499 68.326,45.339 67.056,45.829 65.532,46.863 64.897,47.371 63.881,48.625 63.373,49.784 63.182,50.419 11.303,50.419
GND on Top Layer "Top Layer-GND 1" (solid, pour order 0): -11.049,43.815
GND on Bottom Layer "Bottom Layer-GND" (solid, pour order 14): 11.176,50.419 10.541,49.276 9.398,47.752 8.001,46.355 5.842,44.958 3.81,44.069 1.778,43.688 0.127,43.561 0.127,7.453 2.032,7.239 3.937,6.858 6.223,5.715 7.112,5.207 8.509,4.064 9.271,3.175 10.16,2.159 10.922,0.762 11.303,0.127 63.119,0.127 63.627,1.524 64.135,2.413 64.897,3.556 66.04,4.445 67.691,5.272 68.326,5.499 68.326,45.339 66.929,45.974 66.04,46.482 65.024,47.371 64.516,48.006 64.135,48.514 63.627,49.53 63.373,50.292 63.246,50.419

## Silkscreen, mask and mechanical layers (free items; w line width, h text height)
Bottom Overlay:
  drawing of 1041 lines, arcs and shapes, not listed
Drill Drawing:
  lines w0.254: 0.176,7.424 0.176,43.536 ccw(c0.303,55.536) 11.138,50.374 ; 0.254,7.429 cw(c0.176,-4.572) 11.186,0.203 ; 11.176,50.394 63.092,50.394 ; 11.266,0.14 63.12,0.14 ; 63.156,0.216 cw(c70.129,-1.422) 68.224,5.483 ; 63.224,50.394 ccw(c70.129,52.299) 68.224,45.394 ; 68.279,5.491 68.301,45.364

## Text inside footprints (layer, text, board x,y; h text height)
P1: Top Overlay "B" at 15.71,20.064 h0.7 r90; Top Overlay "A" at 15.71,16 h0.7 r90; Top Overlay "GND" at 15.71,11.453 h0.7 r90; Top Overlay "24V" at 15.71,7.453 h0.7 r90